# Altium PCB PCB1.PcbDoc (part 1 of 2)
Units mil, origin at the board's own origin, x right, y up, seen from the top; angles counter-clockwise.
Board outline 6000 x 4000 mil, 2 copper layers (Top Layer, Bottom Layer); 176 components, 0 nets, 932 pads, 76 vias.
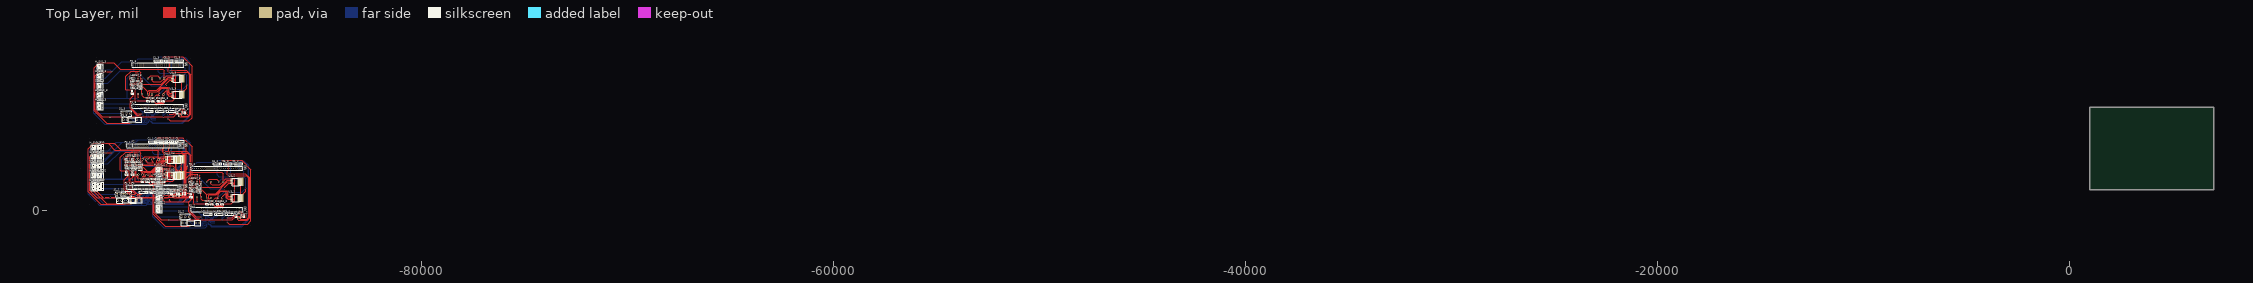
[diagram p0: Top Layer view]
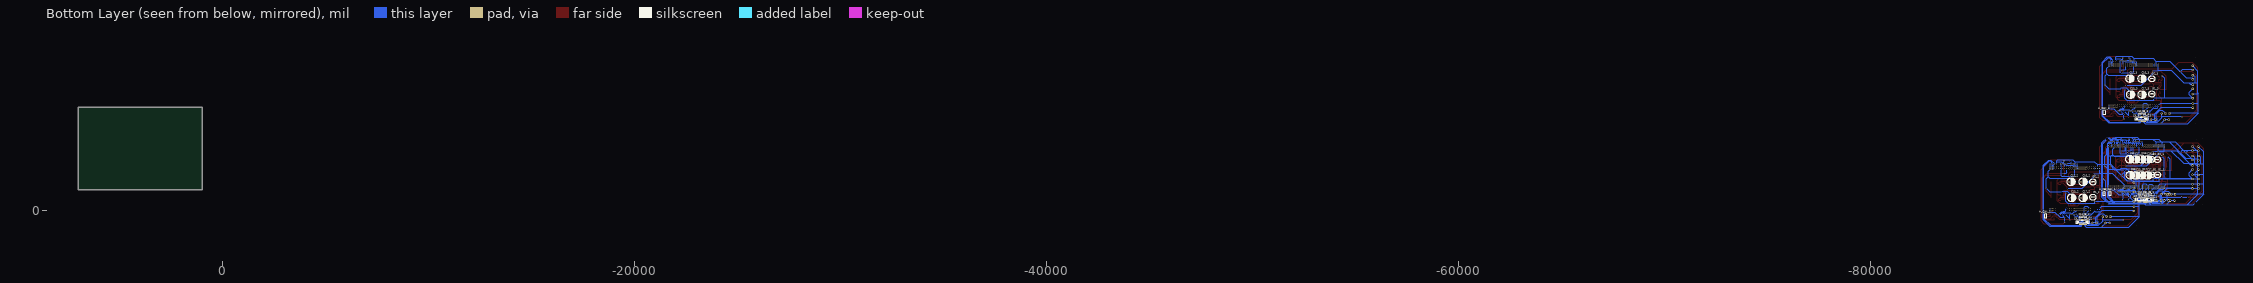
[diagram p1: Bottom Layer view, seen from below]

## Layer stack, top to bottom
Top Solder: solder mask 0.4, Solder Resist, Dk 3.5
Top Layer: signal copper 1.4
Dielectric 1: dielectric 12.6, FR-4, Dk 4.8
Bottom Layer: signal copper 1.4
Bottom Solder: solder mask 0.4, Solder Resist, Dk 3.5

## Board outline
1000,1000 7000,1000 7000,5000 1000,5000

## Design rules (kind name [scope] priority, off if disabled: settings)
Clearance [All] p1: gap=10 ignorepadtopadclearanceinfootprint=FALSE except(0: Arc-Hole Track-Hole SMDPad-Hole THPad-Hole Via-Hole Fill-Hole Poly-Hole Region-Hole Text-Hole)
PolygonConnect [All] p1: connectstyle=Relief reliefconductorwidth=10 reliefentries=4 polygonreliefangle="90 Angle" airgapwidth=10
RoutingVias [All] p1: holewidth=28 width=50 viastyle="Through Hole" minholewidth=28 minwidth=50 maxholewidth=28 maxwidth=50
SolderMaskExpansion [All] p1: expansion=4 istentingtop=FALSE
Width [All] p1: maxlimit=10 minlimit=10 preferedwidth=10
30 further rules are at their usual default settings.

## Components (designator, comment, footprint, x,y, rotation, side; value= is the part's Value field where it differs from the comment)
12V1 "Header 2" HED2 -95609,2177.5 r270 top
12V1_1 "Header 2" HED2 -95899,2167.5 r270 top (schematic designator 12V1)
12V1_2 "Header 2" HED2 -92764,1082.5 r270 top (schematic designator 12V1)
12V1_3 "Header 2" HED2 -95624,6092.5 r270 top (schematic designator 12V1)
C1 "JP4" JP4-C1T -91859,3340 r0 top
C1_1 "JP4" JP4-C1T -92149,3330 r0 top (schematic designator C1)
C1_2 "JP4" JP4-C1T -89014,2245 r0 top (schematic designator C1)
C1_3 "JP4" JP4-C1T -91874,7255 r0 top (schematic designator C1)
C2 "JP4" JP4-C1T -93039,890 r180 top
C2_1 "JP4" JP4-C1T -93329,880 r180 top (schematic designator C2)
C2_2 "JP4" JP4-C1T -90194,-205 r180 top (schematic designator C2)
C2_3 "JP4" JP4-C1T -93054,4805 r180 top (schematic designator C2)
C3 "JP4" JP4-C1T -92289,890 r0 top
C3_1 "JP4" JP4-C1T -92579,880 r0 top (schematic designator C3)
C3_2 "JP4" JP4-C1T -89444,-205 r0 top (schematic designator C3)
C3_3 "JP4" JP4-C1T -92304,4805 r0 top (schematic designator C3)
C4 "JP4" JP4-C1T -92569,3340 r180 top
C4_1 "JP4" JP4-C1T -92859,3330 r180 top (schematic designator C4)
C4_2 "JP4" JP4-C1T -89724,2245 r180 top (schematic designator C4)
C4_3 "JP4" JP4-C1T -92584,7255 r180 top (schematic designator C4)
C5 "JP4" JP4-C1T -92364.01,3340 r0 top
C5_1 "JP4" JP4-C1T -92654.01,3330 r0 top (schematic designator C5)
C5_2 "JP4" JP4-C1T -89519.01,2245 r0 top (schematic designator C5)
C5_3 "JP4" JP4-C1T -92379.01,7255 r0 top (schematic designator C5)
C7 "104" "tu 0805" -91834,825 r90 top
C7_1 "104" "tu 0805" -92124,815 r90 top (schematic designator C7)
C7_2 "104" "tu 0805" -88989,-270 r90 top (schematic designator C7)
C7_3 "104" "tu 0805" -91849,4740 r90 top (schematic designator C7)
C8 "105" "tu 0805" -93264,765 r0 bottom
C8_1 "105" "tu 0805" -93554,755 r0 bottom (schematic designator C8)
C8_2 "105" "tu 0805" -90419,-330 r0 bottom (schematic designator C8)
C8_3 "105" "tu 0805" -93279,4680 r0 bottom (schematic designator C8)
C9 "105" "tu 0805" -92854,515 r90 bottom
C9_1 "105" "tu 0805" -93144,505 r90 bottom (schematic designator C9)
C9_2 "105" "tu 0805" -90009,-580 r90 bottom (schematic designator C9)
C9_3 "105" "tu 0805" -92869,4430 r90 bottom (schematic designator C9)
C10 "105" "tu 0805" -93409,515 r270 bottom
C10_1 "105" "tu 0805" -93699,505 r270 bottom (schematic designator C10)
C10_2 "105" "tu 0805" -90564,-580 r270 bottom (schematic designator C10)
C10_3 "105" "tu 0805" -93424,4430 r270 bottom (schematic designator C10)
C11 "105" "tu 0805" -93054,765 r180 bottom
C11_1 "105" "tu 0805" -93344,755 r180 bottom (schematic designator C11)
C11_2 "105" "tu 0805" -90209,-330 r180 bottom (schematic designator C11)
C11_3 "105" "tu 0805" -93069,4680 r180 bottom (schematic designator C11)
C12 "1000uF" "tu hoa 10mm" -92560,2475 r180 bottom
C12_1 "1000uF" "tu hoa 10mm" -92850,2465 r180 bottom (schematic designator C12)
C12_2 "1000uF" "tu hoa 10mm" -89715,1380 r180 bottom (schematic designator C12)
C12_3 "1000uF" "tu hoa 10mm" -92575,6390 r180 bottom (schematic designator C12)
C13 "1000uF" "tu hoa 10mm" -92590,1700 r180 bottom
C13_1 "1000uF" "tu hoa 10mm" -92880,1690 r180 bottom (schematic designator C13)
C13_2 "1000uF" "tu hoa 10mm" -89745,605 r180 bottom (schematic designator C13)
C13_3 "1000uF" "tu hoa 10mm" -92605,5615 r180 bottom (schematic designator C13)
C14 "104" "tu 0805" -92495,1395 r180 top
C14_1 "104" "tu 0805" -92785,1385 r180 top (schematic designator C14)
C14_2 "104" "tu 0805" -89650,300 r180 top (schematic designator C14)
C14_3 "104" "tu 0805" -92510,5310 r180 top (schematic designator C14)
C15 "104" "tu 0805" -92725,1395 r180 top
C15_1 "104" "tu 0805" -93015,1385 r180 top (schematic designator C15)
C15_2 "104" "tu 0805" -89880,300 r180 top (schematic designator C15)
C15_3 "104" "tu 0805" -92740,5310 r180 top (schematic designator C15)
C16 "1000uF" "tu hoa 10mm" -93143.51,2475 r180 bottom
C16_1 "1000uF" "tu hoa 10mm" -93433.51,2465 r180 bottom (schematic designator C16)
C16_2 "1000uF" "tu hoa 10mm" -90298.51,1380 r180 bottom (schematic designator C16)
C16_3 "1000uF" "tu hoa 10mm" -93158.51,6390 r180 bottom (schematic designator C16)
C17 "1000uF" "tu hoa 10mm" -93146.01,1700 r180 bottom
C17_1 "1000uF" "tu hoa 10mm" -93436.01,1690 r180 bottom (schematic designator C17)
C17_2 "1000uF" "tu hoa 10mm" -90301.01,605 r180 bottom (schematic designator C17)
C17_3 "1000uF" "tu hoa 10mm" -93161.01,5615 r180 bottom (schematic designator C17)
C18 "104" "tu 0805" -93005,1395 r180 top
C18_1 "104" "tu 0805" -93295,1385 r180 top (schematic designator C18)
C18_2 "104" "tu 0805" -90160,300 r180 top (schematic designator C18)
C18_3 "104" "tu 0805" -93020,5310 r180 top (schematic designator C18)
C19 "104" "tu 0805" -93229,1395 r0 top
C19_1 "104" "tu 0805" -93519,1385 r0 top (schematic designator C19)
C19_2 "104" "tu 0805" -90384,300 r0 top (schematic designator C19)
C19_3 "104" "tu 0805" -93244,5310 r0 top (schematic designator C19)
D1 "SS34" DIODE_DO214AC_SMA -93620,2015 r0 top
D1_1 "SS34" DIODE_DO214AC_SMA -93910,2005 r0 top (schematic designator D1)
D1_2 "SS34" DIODE_DO214AC_SMA -90775,920 r0 top (schematic designator D1)
D1_3 "SS34" DIODE_DO214AC_SMA -93635,5930 r0 top (schematic designator D1)
D2 "SS34" DIODE_DO214AC_SMA -93625,2200 r0 top
D2_1 "SS34" DIODE_DO214AC_SMA -93915,2190 r0 top (schematic designator D2)
D2_2 "SS34" DIODE_DO214AC_SMA -90780,1105 r0 top (schematic designator D2)
D2_3 "SS34" DIODE_DO214AC_SMA -93640,6115 r0 top (schematic designator D2)
F1 "F1A" Fuse -94014,475 r180 top value=Fuse
F1_1 "F1A" Fuse -94304,465 r180 top value=Fuse (schematic designator F1)
F1_2 "F1A" Fuse -91169,-620 r180 top value=Fuse (schematic designator F1)
F1_3 "F1A" Fuse -94029,4390 r180 top value=Fuse (schematic designator F1)
G1 "100uH 3A" "CUON CAM 100uH3A" -93620,1725 r180 bottom
G1_1 "100uH 3A" "CUON CAM 100uH3A" -93910,1715 r180 bottom (schematic designator G1)
G1_2 "100uH 3A" "CUON CAM 100uH3A" -90775,630 r180 bottom (schematic designator G1)
G1_3 "100uH 3A" "CUON CAM 100uH3A" -93635,5640 r180 bottom (schematic designator G1)
G2 "100uH 3A" "CUON CAM 100uH3A" -93620,2465 r180 bottom
G2_1 "100uH 3A" "CUON CAM 100uH3A" -93910,2455 r180 bottom (schematic designator G2)
G2_2 "100uH 3A" "CUON CAM 100uH3A" -90775,1370 r180 bottom (schematic designator G2)
G2_3 "100uH 3A" "CUON CAM 100uH3A" -93635,6380 r180 bottom (schematic designator G2)
H_5V1 "Header 2" HED2 -95609,3095 r270 top
H_5V1_1 "Header 2" HED2 -95899,3085 r270 top (schematic designator H_5V1)
H_5V1_2 "Header 2" HED2 -92764,2000 r270 top (schematic designator H_5V1)
H_5V1_3 "Header 2" HED2 -95624,7010 r270 top (schematic designator H_5V1)
H_5V2 "Header 2" HED2 -95609,2636.25 r270 top
H_5V2_1 "Header 2" HED2 -95899,2626.25 r270 top (schematic designator H_5V2)
H_5V2_2 "Header 2" HED2 -92764,1541.25 r270 top (schematic designator H_5V2)
H_5V2_3 "Header 2" HED2 -95624,6551.25 r270 top (schematic designator H_5V2)
H_12V2 "Header 2" HED2 -95609,1718.75 r270 top
H_12V2_1 "Header 2" HED2 -95899,1708.75 r270 top (schematic designator H_12V2)
H_12V2_2 "Header 2" HED2 -92764,623.75 r270 top (schematic designator H_12V2)
H_12V2_3 "Header 2" HED2 -95624,5633.75 r270 top (schematic designator H_12V2)
H_24V "Header 2" HED2 -95609,1260 r270 top
H_24V_1 "Header 2" HED2 -95899,1250 r270 top (schematic designator H_24V)
H_24V_2 "Header 2" HED2 -92764,165 r270 top (schematic designator H_24V)
H_24V_3 "Header 2" HED2 -95624,5175 r270 top (schematic designator H_24V)
H_CAN "JP2" JP2-C1T -91324,770 r90 bottom
H_CAN_1 "JP2" JP2-C1T -91614,760 r90 bottom (schematic designator H_CAN)
H_CAN_2 "JP2" JP2-C1T -88479,-325 r90 bottom (schematic designator H_CAN)
H_CAN_3 "JP2" JP2-C1T -91339,4685 r90 bottom (schematic designator H_CAN)
H_IMU "JP4" JP4-C1T -92804,890 r0 top
H_IMU_1 "JP4" JP4-C1T -93094,880 r0 top (schematic designator H_IMU)
H_IMU_2 "JP4" JP4-C1T -89959,-205 r0 top (schematic designator H_IMU)
H_IMU_3 "JP4" JP4-C1T -92819,4805 r0 top (schematic designator H_IMU)
LED5V "LED" LED-0805-Green -93999,2440 r90 top value="LED 3 - 5 ly 2 Colour"
LED5V_1 "LED" LED-0805-Green -94289,2430 r90 top value="LED 3 - 5 ly 2 Colour" (schematic designator LED5V)
LED5V_2 "LED" LED-0805-Green -91154,1345 r90 top value="LED 3 - 5 ly 2 Colour" (schematic designator LED5V)
LED5V_3 "LED" LED-0805-Green -94014,6355 r90 top value="LED 3 - 5 ly 2 Colour" (schematic designator LED5V)
LED12V "LED" LED-0805-Green -93994,2130 r90 top value="LED 3 - 5 ly 2 Colour"
LED12V_1 "LED" LED-0805-Green -94284,2120 r90 top value="LED 3 - 5 ly 2 Colour" (schematic designator LED12V)
LED12V_2 "LED" LED-0805-Green -91149,1035 r90 top value="LED 3 - 5 ly 2 Colour" (schematic designator LED12V)
LED12V_3 "LED" LED-0805-Green -94009,6045 r90 top value="LED 3 - 5 ly 2 Colour" (schematic designator LED12V)
LED24V "LED" LED-0805-Green -94004,1835 r90 top value="LED 3 - 5 ly 2 Colour"
LED24V_1 "LED" LED-0805-Green -94294,1825 r90 top value="LED 3 - 5 ly 2 Colour" (schematic designator LED24V)
LED24V_2 "LED" LED-0805-Green -91159,740 r90 top value="LED 3 - 5 ly 2 Colour" (schematic designator LED24V)
LED24V_3 "LED" LED-0805-Green -94019,5750 r90 top value="LED 3 - 5 ly 2 Colour" (schematic designator LED24V)
P1 "Header 25X2" HDR2X25 -93944,1080 r0 top
P1_1 "Header 25X2" HDR2X25 -94234,1070 r0 top (schematic designator P1)
P1_2 "Header 25X2" HDR2X25 -91099,-15 r0 top (schematic designator P1)
P1_3 "Header 25X2" HDR2X25 -93959,4995 r0 top (schematic designator P1)
P2 "Header 25X2" HDR2X25 -93944,3080 r0 top
P2_1 "Header 25X2" HDR2X25 -94234,3070 r0 top (schematic designator P2)
P2_2 "Header 25X2" HDR2X25 -91099,1985 r0 top (schematic designator P2)
P2_3 "Header 25X2" HDR2X25 -93959,6995 r0 top (schematic designator P2)
R1 "1k" "tro smd 0805" -91449,825 r270 top
R1_1 "1k" "tro smd 0805" -91739,815 r270 top (schematic designator R1)
R1_2 "1k" "tro smd 0805" -88604,-270 r270 top (schematic designator R1)
R1_3 "1k" "tro smd 0805" -91464,4740 r270 top (schematic designator R1)
R2 "1k" "tro smd 0805" -93999,2335 r180 top
R2_1 "1k" "tro smd 0805" -94289,2325 r180 top (schematic designator R2)
R2_2 "1k" "tro smd 0805" -91154,1240 r180 top (schematic designator R2)
R2_3 "1k" "tro smd 0805" -94014,6250 r180 top (schematic designator R2)
R3 "1k" "tro smd 0805" -93994,2045 r180 top
R3_1 "1k" "tro smd 0805" -94284,2035 r180 top (schematic designator R3)
R3_2 "1k" "tro smd 0805" -91149,950 r180 top (schematic designator R3)
R3_3 "1k" "tro smd 0805" -94009,5960 r180 top (schematic designator R3)
R4 "1k" "tro smd 0805" -93995,1745 r0 top
R4_1 "1k" "tro smd 0805" -94285,1735 r0 top (schematic designator R4)
R4_2 "1k" "tro smd 0805" -91150,650 r0 top (schematic designator R4)
R4_3 "1k" "tro smd 0805" -94010,5660 r0 top (schematic designator R4)
S1 "100SP3T1B1M2QE" SW_100SP3T1B1M2QE -94289,780 r0 top
S1_1 "100SP3T1B1M2QE" SW_100SP3T1B1M2QE -94579,770 r0 top (schematic designator S1)
S1_2 "100SP3T1B1M2QE" SW_100SP3T1B1M2QE -91444,-315 r0 top (schematic designator S1)
S1_3 "100SP3T1B1M2QE" SW_100SP3T1B1M2QE -94304,4695 r0 top (schematic designator S1)
U "SN65HVD230" SOIC127P599X175-8N -91674,815 r90 top
U2 "MAX232" SO16 -93140,515 r270 bottom
U2_1 "MAX232" SO16 -93430,505 r270 bottom (schematic designator U2)
U2_2 "MAX232" SO16 -90295,-580 r270 bottom (schematic designator U2)
U2_3 "MAX232" SO16 -93155,4430 r270 bottom (schematic designator U2)
U3 "LM2576HVS 12.0V SMD" TO263-5 -91840,1690 r270 top
U3_1 "LM2576HVS 12.0V SMD" TO263-5 -92130,1680 r270 top (schematic designator U3)
U3_2 "LM2576HVS 12.0V SMD" TO263-5 -88995,595 r270 top (schematic designator U3)
U3_3 "LM2576HVS 12.0V SMD" TO263-5 -91855,5605 r270 top (schematic designator U3)
U4 "LM2576HVS 5.0V SMD" TO263-5 -91840,2470 r270 top
U4_1 "LM2576HVS 5.0V SMD" TO263-5 -92130,2460 r270 top (schematic designator U4)
U4_2 "LM2576HVS 5.0V SMD" TO263-5 -88995,1375 r270 top (schematic designator U4)
U4_3 "LM2576HVS 5.0V SMD" TO263-5 -91855,6385 r270 top (schematic designator U4)
U_1 "SN65HVD230" SOIC127P599X175-8N -91964,805 r90 top (schematic designator U)
U_2 "SN65HVD230" SOIC127P599X175-8N -88829,-280 r90 top (schematic designator U)
U_3 "SN65HVD230" SOIC127P599X175-8N -91689,4730 r90 top (schematic designator U)

## Footprints (in the part's own frame and the unit in brackets; to place one, negate y for a bottom-side part, rotate by r counter-clockwise, add the part's x,y. Pads: shape width x height; smd on the part's side, far side on the other; paste and mask are expansions set on the pad)
"CUON CAM 100uH3A" [mil] "100uH3A"
  round 90 hole 50: 1(-100,0) 2(100,0)
  silkscreen extent -150,-150 150,150, body extent -171,-175 171,167, height 394
DIODE_DO214AC_SMA [mm] "Diode 2214AC- SMA type"
  rect 2.5x1.7 smd: 1(-2.032,0) 2(2.032,0)
  silkscreen extent -2.59,-1.63 2.46,1.7, body extent -2.53,-1.35 2.47,1.35, height 2.25
Fuse [mil] "De Fuse"
  oval 100x120 hole 50: 1(-425,0) 1(-225,0) 2(225,0) 2(425,0)
  silkscreen extent -475,-125 475,125, body extent -448,-117 459,127, height 378
HDR2X25 [mm] "Connector; Header; 25x2 Position"
  rect 1.5x1.5 hole 0.9: 1(0,0)
  round 1.5 hole 0.9: 2(0,2.54) 3(2.54,0) 4(2.54,2.54) 5(5.08,0) 6(5.08,2.54) 7(7.62,0) 8(7.62,2.54) 9(10.16,0) 10(10.16,2.54) 11(12.7,0) 12(12.7,2.54) 13(15.24,0) 14(15.24,2.54) 15(17.78,0) 16(17.78,2.54) 17(20.32,0) 18(20.32,2.54) 19(22.86,0) 20(22.86,2.54) 21(25.4,0) 22(25.4,2.54) 23(27.94,0) 24(27.94,2.54) 25(30.48,0) 26(30.48,2.54) 27(33.02,0) 28(33.02,2.54) 29(35.56,0) 30(35.56,2.54) 31(38.1,0) 32(38.1,2.54) 33(40.64,0) 34(40.64,2.54) 35(43.18,0) 36(43.18,2.54) 37(45.72,0) 38(45.72,2.54) 39(48.26,0) 40(48.26,2.54) 41(50.8,0) 42(50.8,2.54) 43(53.34,0) 44(53.34,2.54) 45(55.88,0) 46(55.88,2.54) 47(58.42,0) 48(58.42,2.54) 49(60.96,0) 50(60.96,2.54)
  silkscreen extent -1.27,-1.27 62.23,3.81
HED2 [mil] "Header 2, 2 pin, hight 300mil, Pin to Pin 200, Colour Green"
  round 110 hole 50: 1(0,0) 2(200,0)
  silkscreen extent -106,-100 300,200, body extent -92,-140 302,155, height 394
JP2-C1T [mm] "2 row, straight, gold plating"
  rect 1.52x1.52 hole 1.02: 1(0,0)
  round 1.52 hole 1.02: 2(2.54,0)
  silkscreen extent -1.52,-1.27 4.06,1.27, body extent -1.52,-1.25 4.06,1.25, height 8.51
JP4-C1T [mm] "4 row, straight, gold plating"
  rect 1.52x1.52 hole 1.02: 1(0,0)
  round 1.52 hole 1.02: 2(2.54,0) 3(5.08,0) 4(7.62,0)
  silkscreen extent -1.52,-1.27 9.14,1.27, body extent -1.52,-1.25 9.14,1.25, height 8.51
LED-0805-Green [mil]
  rect 50x55 smd: 1(0,0) 2(90,0)
  silkscreen extent 0,-35 90,35, body extent 5,-25 85,25, height 43
SO16 [mm] "SOIC, 16-Leads, Body 9.90x3.91mm, Pitch 1.27mm, IPC Medium Density"
  oval 2x0.55 smd: 1(-2.7,4.445) 2(-2.7,3.175) 3(-2.7,1.905) 4(-2.7,0.635) 5(-2.7,-0.635) 6(-2.7,-1.905) 7(-2.7,-3.175) 8(-2.7,-4.445) 9(2.7,-4.445) 10(2.7,-3.175) 11(2.7,-1.905) 12(2.7,-0.635) 13(2.7,0.635) 14(2.7,1.905) 15(2.7,3.175) 16(2.7,4.445)
  silkscreen extent -2.82,-4.95 1.55,5.39, body extent -3,-4.95 3,4.95, height 1.4
SOIC127P599X175-8N [mm]
  rrect25% 1.97x0.6 smd: 1(-2.47,1.905) 2(-2.47,0.635) 3(-2.47,-0.635) 4(-2.47,-1.905) 5(2.47,-1.905) 6(2.47,-0.635) 7(2.47,0.635) 8(2.47,1.905)
  silkscreen extent -4.05,-2.52 1.99,2.52
SW_100SP3T1B1M2QE [mm]
  rect 2.775x2.775 / inner round 2.775 / far side rect 2.775x2.775 hole 1.85: 1(-4.7,0)
  round 2.775 hole 1.85: 2(0,0) 3(4.7,0)
  silkscreen extent -7.2,-3.43 6.35,3.43
TO263-5 [mil] "TO263-5"
  rect 39.37x120 smd: 1(-140,-230) 2(-70,-230) 3(0,-230) 4(70,-230) 5(140,-230)
  rect 393.7x275.59 smd: 6(-5,230)
  silkscreen extent -180,-170 180,260, body extent -200,-242 200,310, height 180
"tro smd 0805" [mm]
  rect 1.2x1.4 smd: 1(-0.946,-0.061) 2(0.954,-0.061)
  silkscreen extent -1.75,-0.97 1.75,0.84, body extent -1.56,-0.76 1.44,0.64, height 0.53
"tu 0805" [mm] "Compoment SMD 80x50mil"
  rect 1.2x1.4 smd: 1(-0.946,-0.003) 2(0.954,-0.003)
  silkscreen extent -1.75,-0.89 1.75,0.89, body extent -1.01,-0.64 1.01,0.63, height 0.61
"tu hoa 10mm" [mm]
  rect 2.1x2.1 hole 0.9: 1(-2.54,0)
  round 2.1 hole 0.9: 2(2.54,0)
  silkscreen extent -4.95,-4.96 4.93,4.92, body extent -5,-5 5.01,5, height 20.01

## Part data
12V1 12V1_1 12V1_2 12V1_3 H_5V1 H_5V1_1 H_5V1_2 H_5V1_3 H_5V2 H_5V2_1 H_5V2_2 H_5V2_3 H_12V2 H_12V2_1 H_12V2_2 H_12V2_3 H_24V H_24V_1 H_24V_2 H_24V_3: "Header, 2-Pin", Manufacturer="Generic Components", Class=Connector
C1 C1_1 C1_2 C1_3 C2 C2_1 C2_2 C2_3 C3 C3_1 C3_2 C3_3 C4 C4_1 C4_2 C4_3 C5 C5_1 C5_2 C5_3 H_IMU H_IMU_1 H_IMU_2 H_IMU_3: "WR-PHD 2.54 mm Angled Socket Header", Manufacturer="W¨¹rth Elektronik eiSos GmbH", partNo=613004143121, ComponentLink1 Description=Manufacturer, ComponentLink1URL=http://www.we-online.com, ComponentLink2 Description=Datasheet, ComponentLink2URL=http://katalog.we-online.de/em/datasheet/6130xx143121.pdf, Created by="Karrer Zheng", Created Date="29 March 2013", NoPins=04
C7 C7_1 C7_2 C7_3 C14 C14_1 C14_2 C14_3 C15 C15_1 C15_2 C15_3 C18 C18_1 C18_2 C18_3 C19 C19_1 C19_2 C19_3: library part "Tu 0805 104 50V 10%", "Dán", Chung_Loai=Dán, Don_Vi=Con, Ma_Hang=MH004551, So_Chan=2, Ten_Linh_Kien="Tụ 0805 104-100nF 10% 50V"
C8 C8_1 C8_2 C8_3 C9 C9_1 C9_2 C9_3 C10 C10_1 C10_2 C10_3 C11 C11_1 C11_2 C11_3: library part "Tu 0805 105 50V 10%", "Dán", Chung_Loai=Dán, Don_Vi=Con, Ma_Hang=MH004552, So_Chan=2, Ten_Linh_Kien="Tụ 0805 105-1uF 10% 50V"
C12 C12_1 C12_2 C12_3 C13 C13_1 C13_2 C13_3 C16 C16_1 C16_2 C16_3 C17 C17_1 C17_2 C17_3: library part "Tu Hoa 1000uF 10V 10x12", "Cắm", Chung_Loai=Cắm, Don_Vi=Con, Ma_Hang=MH006614, So_Chan=2, Ten_Linh_Kien="Tụ Hóa 1000uF 10V 10x12MM"
D1 D1_1 D1_2 D1_3 D2 D2_1 D2_2 D2_3: "DIODE SCHOTTKY 40V 3A SMA", MPN=SS34, Solder=SMT
F1 F1_1 F1_2 F1_3: library part Fuse, "Fuse", Designed by=VanDungEvn
G1 G1_1 G1_2 G1_3 G2 G2_1 G2_2 G2_3: library part "CUON CAM 100uH DIP", "Dán", Chung_Loai=Dán, Don_Vi=Con, Ma_Hang=MH002209, Ten_Linh_Kien="Cuộn Cảm 100uH 3A 8x10MM"
H_CAN H_CAN_1 H_CAN_2 H_CAN_3: "WR-PHD 2.54 mm Angled Socket Header", Manufacturer="W¨¹rth Elektronik eiSos GmbH", partNo=613002143121, ComponentLink1 Description=Manufacturer, ComponentLink1URL=http://www.we-online.com, ComponentLink2 Description=Datasheet, ComponentLink2URL=http://katalog.we-online.de/em/datasheet/6130xx143121.pdf, Created by="Karrer Zheng", Created Date="29 March 2013", NoPins=02
LED5V LED5V_1 LED5V_2 LED5V_3 LED12V LED12V_1 LED12V_2 LED12V_3 LED24V LED24V_1 LED24V_2 LED24V_3: library part "LED SMD"
P1 P1_1 P1_2 P1_3 P2 P2_1 P2_2 P2_3: "Header, 25-Pin, Dual row", LatestRevisionDate=17-Jul-2002, LatestRevisionNote="Re-released for DXP Platform.", Publisher="Altium Limited"
R1 R1_1 R1_2 R1_3 R2 R2_1 R2_2 R2_3 R3 R3_1 R3_2 R3_3 R4 R4_1 R4_2 R4_3: library part "Tro 0805 1% 470k", "Dán", Chung_Loai=Dán, Don_Vi=Con, Ma_Hang=MH005485, So_Chan=2, Ten_Linh_Kien="Trở 0805 1% 470k"
S1 S1_1 S1_2 S1_3: Package=None, Availability=Unavailable, MF="{'manufacturer': u'E-Switch'}", MP=100SP3T1B1M2QE, Price=None
U U_1 U_2 U_3: "1/1 Transceiver Half CANbus 8-SOIC", Package="SOIC-8 Texas Instruments", Availability=Unavailable, MF="Texas Instruments", MP=SN65HVD230, Price=None, SnapEDA_Link=https://www.snapeda.com/parts/SN65HVD230/Texas%20Instruments/view-part/558072/?ref=snap
U2 U2_1 U2_2 U2_3: "RS232 LEVEL SHIFTER", Manufacturer="Texas Instruments", Manufacturer Part Number=MAX232DR, Package / Case="16-SOIC (3.9mm Width)", Supplier Part Number=296-14619-1-ND, Voltage - Supply="4.5 V ~ 5.5 V", Category="Integrated Circuits (ICs)", Number of Drivers/Receivers=2/2, Packaging="Cut Tape (CT)", Protocol=RS232, RoHS="RoHS Compliant", Supplier=Digi-Key, Supplier 1=Digi-Key, Supplier Part Number 1=296-14619-1-ND, Type=Transceiver
U3 U3_1 U3_2 U3_3: library part "LM2576HVS 5.0V SMD", "Dán", Chung_Loai=Dán, Don_Vi=Con, Ma_Hang=MH002362, Ten_Linh_Kien="LM2576HVS-5.0V BUCK 5V 3A TO263-5"
U4 U4_1 U4_2 U4_3: "Dán", Chung_Loai=Dán, Don_Vi=Con, Ma_Hang=MH002362, Ten_Linh_Kien="LM2576HVS-5.0V BUCK 5V 3A TO263-5"

## Free pads (board coordinates)
  round 60 hole 125.98: 3(-96569,1990) 3(-96564,1990) 3(-96279,2000) 3(-96274,2000) 3(-96064,3450) 3(-95789,7375) 3(-95774,3460) 3(-95244,5870) 3(-95099,5915) 3(-93434,905) 3(-93429,905) 3(-92929,2365) 4(-96064,315) 4(-95789,4240) 4(-95774,325) 4(-92929,-770) 5(-91444,305) 5(-91169,4230) 5(-91154,315) 5(-88309,-780) 6(-91439,3475) 6(-91164,7400) 6(-91149,3485) 6(-88304,2390)

## Via types
v1: diameter 60, hole 35.43, Top Layer to Bottom Layer, 68 vias
v2: diameter 60, hole 28, Top Layer to Bottom Layer, 4 vias
v3: diameter 50, hole 28, Top Layer to Bottom Layer, 4 vias

## Nets (pads, with @x,y where several pads share a name; then routed paths per layer and width w, separated by ;. In a path a pad name is that pad's centre, name@x,y a point inside that pad or via, vN(x,y) a via of type N, cw(c..) or ccw(c..) an arc to the next point about the centre after c; other vN are vias at no path point)
pads on no net: 12V1.1 12V1.2 12V1_1.1 12V1_1.2 12V1_2.1 12V1_2.2 12V1_3.1 12V1_3.2 C1.1 C1.2 C1.3 C1.4 C1_1.1 C1_1.2 C1_1.3 C1_1.4 C1_2.1 C1_2.2 C1_2.3 C1_2.4 C1_3.1 C1_3.2 C1_3.3 C1_3.4 C2.1 C2.2 C2.3 C2.4 C2_1.1 C2_1.2 C2_1.3 C2_1.4 C2_2.1 C2_2.2 C2_2.3 C2_2.4 C2_3.1 C2_3.2 C2_3.3 C2_3.4 C3.1 C3.2 C3.3 C3.4 C3_1.1 C3_1.2 C3_1.3 C3_1.4 C3_2.1 C3_2.2 C3_2.3 C3_2.4 C3_3.1 C3_3.2 C3_3.3 C3_3.4 C4.1 C4.2 C4.3 C4.4 C4_1.1 C4_1.2 C4_1.3 C4_1.4 C4_2.1 C4_2.2 C4_2.3 C4_2.4 C4_3.1 C4_3.2 C4_3.3 C4_3.4 C5.1 C5.2 C5.3 C5.4 C5_1.1 C5_1.2 C5_1.3 C5_1.4 C5_2.1 C5_2.2 C5_2.3 C5_2.4 C5_3.1 C5_3.2 C5_3.3 C5_3.4 C7.1 C7.2 C7_1.1 C7_1.2 C7_2.1 C7_2.2 C7_3.1 C7_3.2 C8.1 C8.2 C8_1.1 C8_1.2 C8_2.1 C8_2.2 C8_3.1 C8_3.2 C9.1 C9.2 C9_1.1 C9_1.2 C9_2.1 C9_2.2 C9_3.1 C9_3.2 C10.1 C10.2 C10_1.1 C10_1.2 C10_2.1 C10_2.2 C10_3.1 C10_3.2 C11.1 C11.2 C11_1.1 C11_1.2 C11_2.1 C11_2.2 C11_3.1 C11_3.2 C12.1 C12.2 C12_1.1 C12_1.2 C12_2.1 C12_2.2 C12_3.1 C12_3.2 C13.1 C13.2 C13_1.1 C13_1.2 C13_2.1 C13_2.2 C13_3.1 C13_3.2 C14.1 C14.2 C14_1.1 C14_1.2 C14_2.1 C14_2.2 C14_3.1 C14_3.2 C15.1 C15.2 C15_1.1 C15_1.2 C15_2.1 C15_2.2 C15_3.1 C15_3.2 C16.1 C16.2 C16_1.1 C16_1.2 C16_2.1 C16_2.2 C16_3.1 C16_3.2 C17.1 C17.2 C17_1.1 C17_1.2 C17_2.1 C17_2.2 C17_3.1 C17_3.2 C18.1 C18.2 C18_1.1 C18_1.2 C18_2.1 C18_2.2 C18_3.1 C18_3.2 C19.1 C19.2 C19_1.1 C19_1.2 C19_2.1 C19_2.2 C19_3.1 C19_3.2 D1.1 D1.2 D1_1.1 D1_1.2 D1_2.1 D1_2.2 D1_3.1 D1_3.2 D2.1 D2.2 D2_1.1 D2_1.2 D2_2.1 D2_2.2 D2_3.1 D2_3.2 F1.1 F1.2 F1_1.1 F1_1.2 F1_2.1 F1_2.2 F1_3.1 F1_3.2 G1.1 G1.2 G1_1.1 G1_1.2 G1_2.1 G1_2.2 G1_3.1 G1_3.2 G2.1 G2.2 G2_1.1 G2_1.2 G2_2.1 G2_2.2 G2_3.1 G2_3.2 H_5V1.1 H_5V1.2 H_5V1_1.1 H_5V1_1.2 H_5V1_2.1 H_5V1_2.2 H_5V1_3.1 H_5V1_3.2 H_5V2.1 H_5V2.2 H_5V2_1.1 H_5V2_1.2 H_5V2_2.1 H_5V2_2.2 H_5V2_3.1 H_5V2_3.2 H_12V2.1 H_12V2.2 H_12V2_1.1 H_12V2_1.2 H_12V2_2.1 H_12V2_2.2 H_12V2_3.1 H_12V2_3.2 H_24V.1 H_24V.2 H_24V_1.1 H_24V_1.2 H_24V_2.1 H_24V_2.2 H_24V_3.1 H_24V_3.2 H_CAN.1 H_CAN.2 H_CAN_1.1 H_CAN_1.2 H_CAN_2.1 H_CAN_2.2 H_CAN_3.1 H_CAN_3.2 H_IMU.1 H_IMU.2 H_IMU.3 H_IMU.4 H_IMU_1.1 H_IMU_1.2 H_IMU_1.3 H_IMU_1.4 H_IMU_2.1 H_IMU_2.2 H_IMU_2.3 H_IMU_2.4 H_IMU_3.1 H_IMU_3.2 H_IMU_3.3 H_IMU_3.4 LED5V.1 LED5V.2 LED5V_1.1 LED5V_1.2 LED5V_2.1 LED5V_2.2 LED5V_3.1 LED5V_3.2 LED12V.1 LED12V.2 LED12V_1.1 LED12V_1.2 LED12V_2.1 LED12V_2.2 LED12V_3.1 LED12V_3.2 LED24V.1 LED24V.2 LED24V_1.1 LED24V_1.2 LED24V_2.1 LED24V_2.2 LED24V_3.1 LED24V_3.2 P1.1 P1.2 P1.3 P1.4 P1.5 P1.6 P1.7 P1.8 P1.9 P1.10 P1.11 P1.12 P1.13 P1.14 P1.15 P1.16 P1.17 P1.18 P1.19 P1.20 P1.21 P1.22 P1.23 P1.24 P1.25 P1.26 P1.27 P1.28 P1.29 P1.30 P1.31 P1.32 P1.33 P1.34 P1.35 P1.36 P1.37 P1.38 P1.39 P1.40 P1.41 P1.42 P1.43 P1.44 P1.45 P1.46 P1.47 P1.48 P1.49 P1.50 P1_1.1 P1_1.2 P1_1.3 P1_1.4 P1_1.5 P1_1.6 P1_1.7 P1_1.8 P1_1.9 P1_1.10 P1_1.11 P1_1.12 P1_1.13 P1_1.14 P1_1.15 P1_1.16 P1_1.17 P1_1.18 P1_1.19 P1_1.20 P1_1.21 P1_1.22 P1_1.23 P1_1.24 P1_1.25 P1_1.26 P1_1.27 P1_1.28 P1_1.29 P1_1.30 P1_1.31 P1_1.32 P1_1.33 P1_1.34 P1_1.35 P1_1.36 P1_1.37 P1_1.38 P1_1.39 P1_1.40 P1_1.41 P1_1.42 P1_1.43 P1_1.44 P1_1.45 P1_1.46 P1_1.47 P1_1.48 P1_1.49 P1_1.50 P1_2.1 P1_2.2 P1_2.3 P1_2.4 P1_2.5 P1_2.6 P1_2.7 P1_2.8 P1_2.9 P1_2.10 P1_2.11 P1_2.12 P1_2.13 P1_2.14 P1_2.15 P1_2.16 P1_2.17 P1_2.18 P1_2.19 P1_2.20 P1_2.21 P1_2.22 P1_2.23 P1_2.24 P1_2.25 P1_2.26 P1_2.27 P1_2.28 P1_2.29 P1_2.30 P1_2.31 P1_2.32 P1_2.33 P1_2.34 P1_2.35 P1_2.36 P1_2.37 P1_2.38 P1_2.39 P1_2.40 P1_2.41 P1_2.42 P1_2.43 P1_2.44 P1_2.45 P1_2.46 P1_2.47 P1_2.48 P1_2.49 P1_2.50 P1_3.1 P1_3.2 P1_3.3 P1_3.4 P1_3.5 P1_3.6 P1_3.7 P1_3.8 P1_3.9 P1_3.10 P1_3.11 P1_3.12 P1_3.13 P1_3.14 P1_3.15 P1_3.16 P1_3.17 P1_3.18 P1_3.19 P1_3.20 P1_3.21 P1_3.22 P1_3.23 P1_3.24 P1_3.25 P1_3.26 P1_3.27 P1_3.28 P1_3.29 P1_3.30 P1_3.31 P1_3.32 P1_3.33 P1_3.34 P1_3.35 P1_3.36 P1_3.37 P1_3.38 P1_3.39 P1_3.40 P1_3.41 P1_3.42 P1_3.43 P1_3.44 P1_3.45 P1_3.46 P1_3.47 P1_3.48 P1_3.49 P1_3.50 P2.1 P2.2 P2.3 P2.4 P2.5 P2.6 P2.7 P2.8 P2.9 P2.10 P2.11 P2.12 P2.13 P2.14 P2.15 P2.16 P2.17 P2.18 P2.19 P2.20 P2.21 P2.22 P2.23 P2.24 P2.25 P2.26 P2.27 P2.28 P2.29 P2.30 P2.31 P2.32 P2.33 P2.34 P2.35 P2.36 P2.37 P2.38 P2.39 P2.40 P2.41 P2.42 P2.43 P2.44 P2.45 P2.46 P2.47 P2.48 P2.49 P2.50 P2_1.1 P2_1.2 P2_1.3 P2_1.4 P2_1.5 P2_1.6 P2_1.7 P2_1.8 P2_1.9 P2_1.10 P2_1.11 P2_1.12 P2_1.13 P2_1.14 P2_1.15 P2_1.16 P2_1.17 P2_1.18 P2_1.19 P2_1.20 P2_1.21 P2_1.22 P2_1.23 P2_1.24 P2_1.25 P2_1.26 P2_1.27 P2_1.28 P2_1.29 P2_1.30 P2_1.31 P2_1.32 P2_1.33 P2_1.34 P2_1.35 P2_1.36 P2_1.37 P2_1.38 P2_1.39 P2_1.40 P2_1.41 P2_1.42 P2_1.43 P2_1.44 P2_1.45 P2_1.46 P2_1.47 P2_1.48 P2_1.49 P2_1.50 P2_2.1 P2_2.2 P2_2.3 P2_2.4 P2_2.5 P2_2.6 P2_2.7 P2_2.8 P2_2.9 P2_2.10 P2_2.11 P2_2.12 P2_2.13 P2_2.14 P2_2.15 P2_2.16 P2_2.17 P2_2.18 P2_2.19 P2_2.20 P2_2.21 P2_2.22 P2_2.23 P2_2.24 P2_2.25 P2_2.26 P2_2.27 P2_2.28 P2_2.29 P2_2.30 P2_2.31 P2_2.32 P2_2.33 P2_2.34 P2_2.35 P2_2.36 P2_2.37 P2_2.38 P2_2.39 P2_2.40 P2_2.41 P2_2.42 P2_2.43 P2_2.44 P2_2.45 P2_2.46 P2_2.47 P2_2.48 P2_2.49 P2_2.50 P2_3.1 P2_3.2 P2_3.3 P2_3.4 P2_3.5 P2_3.6 P2_3.7 P2_3.8 P2_3.9 P2_3.10 P2_3.11 P2_3.12 P2_3.13 P2_3.14 P2_3.15 P2_3.16 P2_3.17 P2_3.18 P2_3.19 P2_3.20 P2_3.21 P2_3.22 P2_3.23 P2_3.24 P2_3.25 P2_3.26 P2_3.27 P2_3.28 P2_3.29 P2_3.30 P2_3.31 P2_3.32 P2_3.33 P2_3.34 P2_3.35 P2_3.36 P2_3.37 P2_3.38 P2_3.39 P2_3.40 P2_3.41 P2_3.42 P2_3.43 P2_3.44 P2_3.45 P2_3.46 P2_3.47 P2_3.48 P2_3.49 P2_3.50 R1.1 R1.2 R1_1.1 R1_1.2 R1_2.1 R1_2.2 R1_3.1 R1_3.2 R2.1 R2.2 R2_1.1 R2_1.2 R2_2.1 R2_2.2 R2_3.1 R2_3.2 R3.1 R3.2 R3_1.1 R3_1.2 R3_2.1 R3_2.2 R3_3.1 R3_3.2 R4.1 R4.2 R4_1.1 R4_1.2 R4_2.1 R4_2.2 R4_3.1 R4_3.2 S1.1 S1.2 S1.3 S1_1.1 S1_1.2 S1_1.3 S1_2.1 S1_2.2 S1_2.3 S1_3.1 S1_3.2 S1_3.3 U2.1 U2.2 U2.3 U2.4 U2.5 U2.6 U2.7 U2.8 U2.9 U2.10 U2.11 U2.12 U2.13 U2.14 U2.15 U2.16 U2_1.1 U2_1.2 U2_1.3 U2_1.4 U2_1.5 U2_1.6 U2_1.7 U2_1.8 U2_1.9 U2_1.10 U2_1.11 U2_1.12 U2_1.13 U2_1.14 U2_1.15 U2_1.16 U2_2.1 U2_2.2 U2_2.3 U2_2.4 U2_2.5 U2_2.6 U2_2.7 U2_2.8 U2_2.9 U2_2.10 U2_2.11 U2_2.12 U2_2.13 U2_2.14 U2_2.15 U2_2.16 U2_3.1 U2_3.2 U2_3.3 U2_3.4 U2_3.5 U2_3.6 U2_3.7 U2_3.8 U2_3.9 U2_3.10 U2_3.11 U2_3.12 U2_3.13 U2_3.14 U2_3.15 U2_3.16 U3.1 U3.2 U3.3 U3.4 U3.5 U3.6 U3_1.1 U3_1.2 U3_1.3 U3_1.4 U3_1.5 U3_1.6 U3_2.1 U3_2.2 U3_2.3 U3_2.4 U3_2.5 U3_2.6 U3_3.1 U3_3.2 U3_3.3 U3_3.4 U3_3.5 U3_3.6 U4.1 U4.2 U4.3 U4.4 U4.5 U4.6 U4_1.1 U4_1.2 U4_1.3 U4_1.4 U4_1.5 U4_1.6 U4_2.1 U4_2.2 U4_2.3 U4_2.4 U4_2.5 U4_2.6 U4_3.1 U4_3.2 U4_3.3 U4_3.4 U4_3.5 U4_3.6 U.1 U.2 U.3 U.4 U.5 U.6 U.7 U.8 U_1.1 U_1.2 U_1.3 U_1.4 U_1.5 U_1.6 U_1.7 U_1.8 U_2.1 U_2.2 U_2.3 U_2.4 U_2.5 U_2.6 U_2.7 U_2.8 U_3.1 U_3.2 U_3.3 U_3.4 U_3.5 U_3.6 U_3.7 U_3.8